# Altium PCB Main.PcbDoc
Units mm, origin at the board's own origin, x right, y up, seen from the top; angles counter-clockwise.
Board outline 300 x 200 mm, 2 copper layers (Top Layer, Bottom Layer), stack 1.671 mm thick; 38 components, 61 nets, 422 pads, 37 vias.
Unrouted connection lines stored in the file: 3.
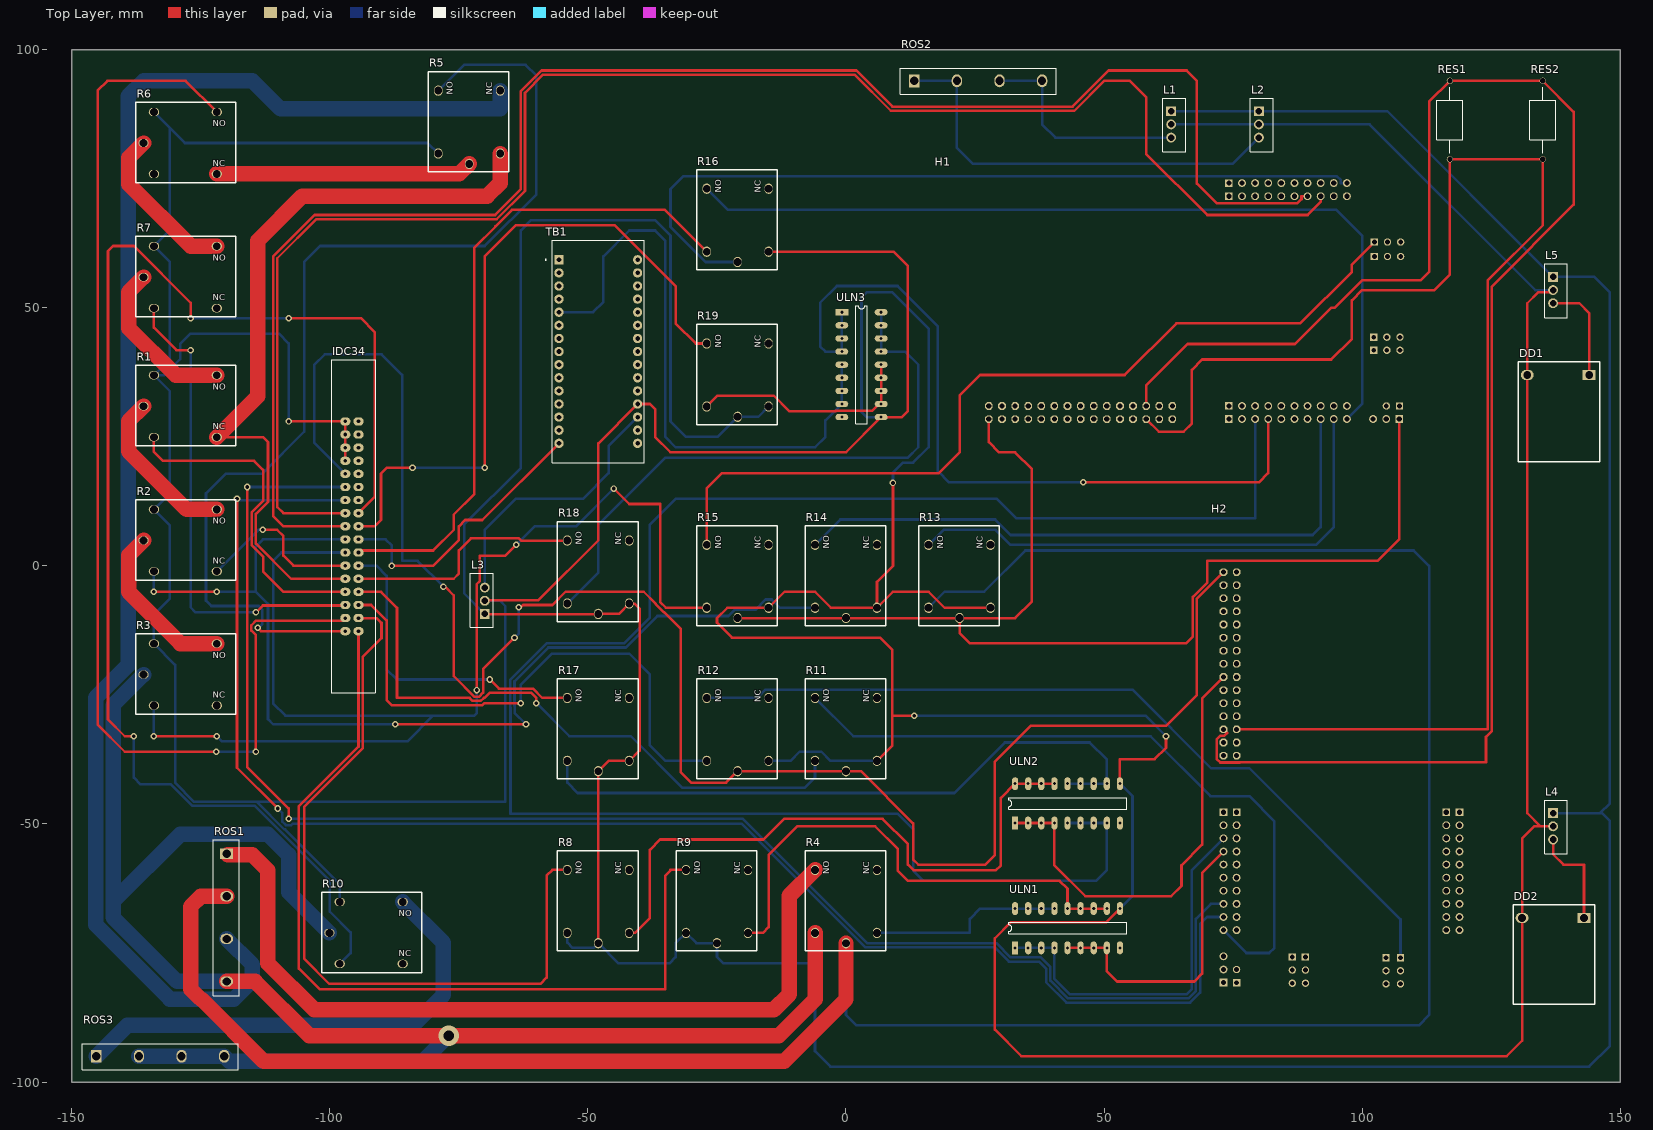
[diagram p0: Top Layer view]
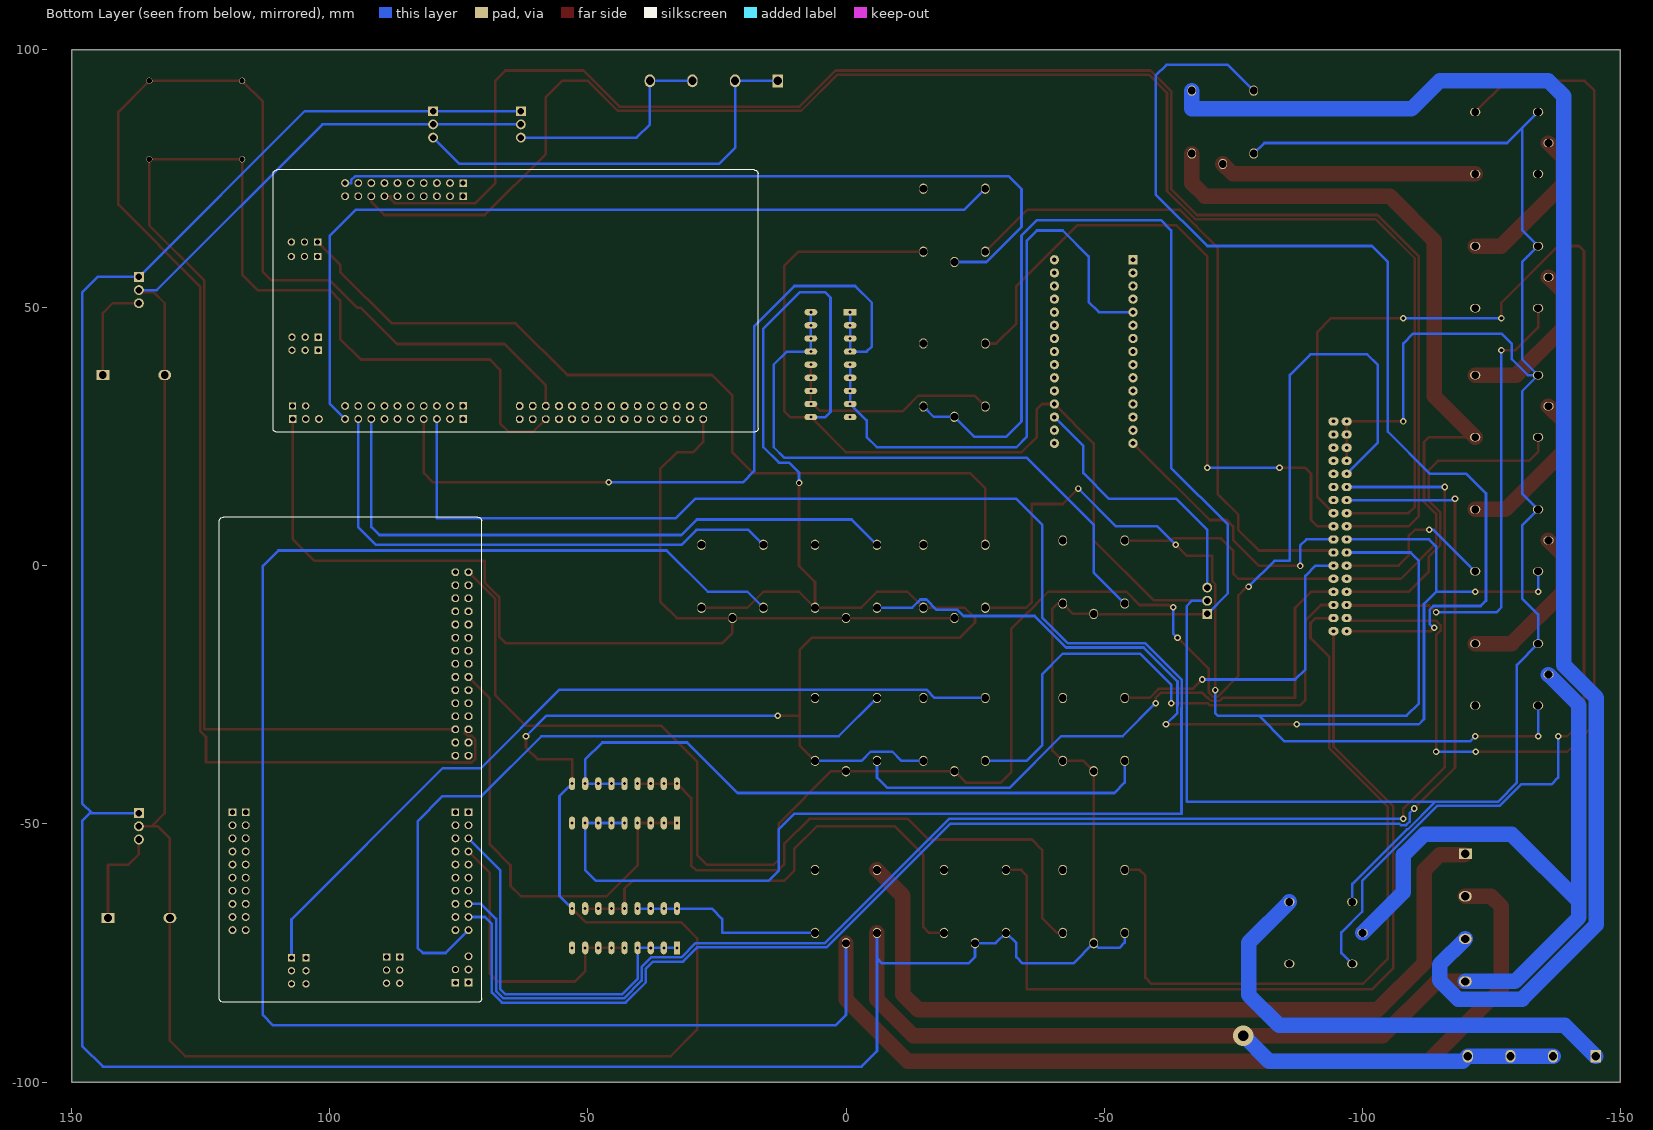
[diagram p1: Bottom Layer view, seen from below]
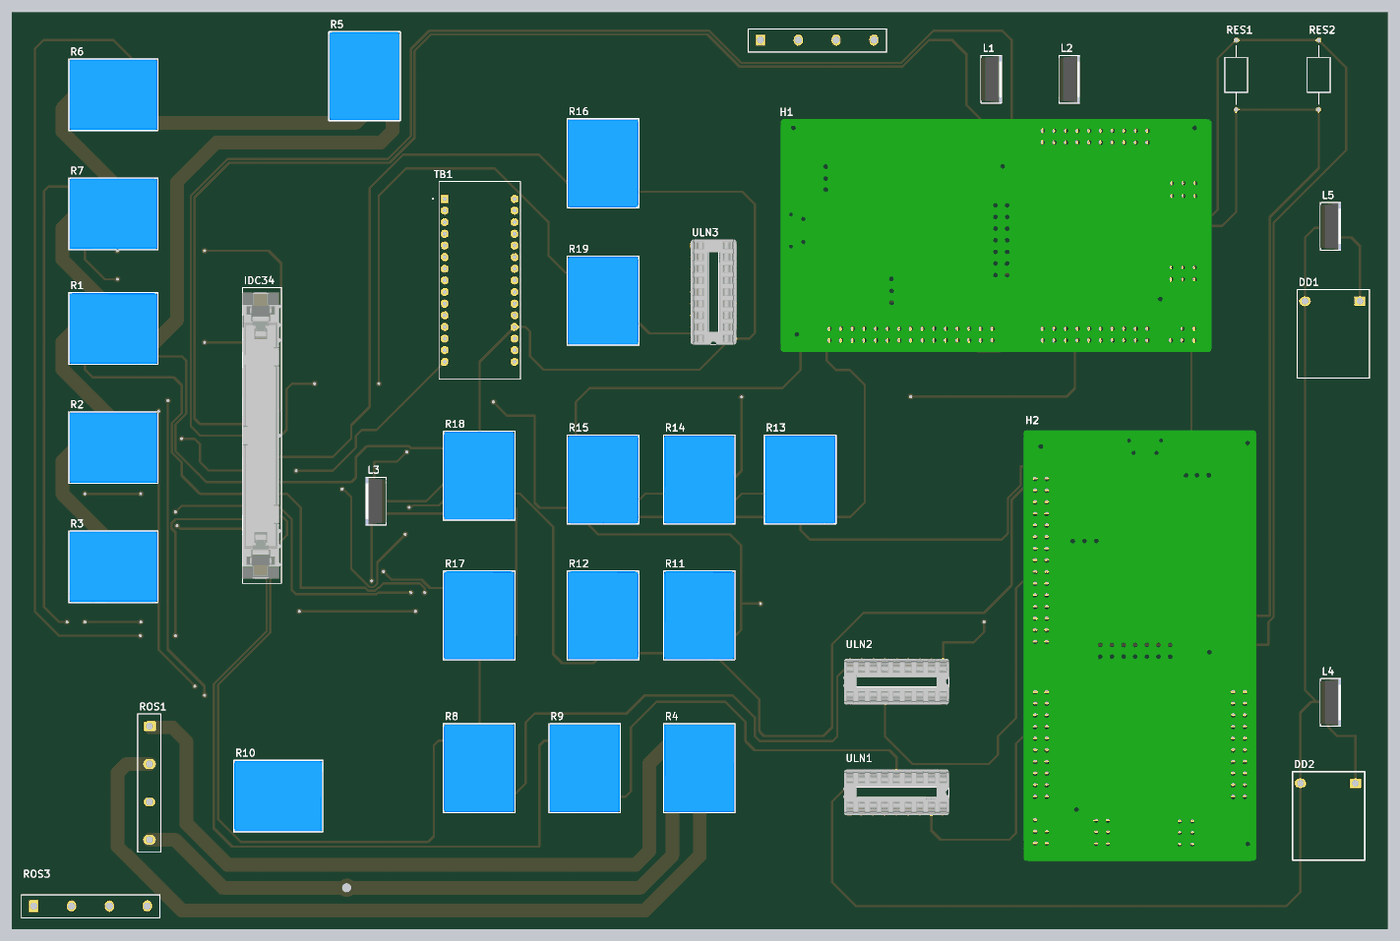
[diagram p2: 3D render of the assembled board from above, using the file's embedded part models]

## Layer stack, top to bottom
Top Solder: solder mask 0.0102, Solder Resist, Dk 3.5
Top Layer: signal copper 0.0356
Dielectric 1: dielectric 1.6, FR-4, Dk 4.8
Bottom Layer: signal copper 0.0356
Bottom Solder: solder mask 0.0102, Solder Resist, Dk 3.5

## Board outline
150,-100 150,100 -150,100 -150,-100

## Design rules (kind name [scope] priority, off if disabled: settings)
Clearance [All] p1: gap=0.5 ignorepadtopadclearanceinfootprint=FALSE
Height [All] p1: minheight=0 maxheight=100 prefheight=12.7
PolygonConnect [All] p1: connectstyle=Relief reliefconductorwidth=0.254 reliefentries=4 polygonreliefangle="90 Angle" airgapwidth=0.254
RoutingVias [All] p1: holewidth=0.3 width=0.6 viastyle="Through Hole" minholewidth=0.3 minwidth=0.6 maxholewidth=0.3 maxwidth=0.6
SolderMaskExpansion [All] p1: expansion=0.102
Width [All] p1: maxlimit=3 minlimit=0.5 preferedwidth=0.5
29 further rules are at their usual default settings.

## Components (designator, comment, footprint, x,y, rotation, side; value= is the part's Value field where it differs from the comment)
DD1 "DD" DCDCBOOST 144,37 r180 top
DD2 "DD" DCDCBOOST 143,-68.2 r180 top
H1 "RM42" HERCULES 60.49,51.322 r180 top
H2 "RM42" HERCULES 96,-34 r90 top
IDC34 "IDC Header" IDC34 -95.73,7.68 r0 top
L1 "L7805C-V" L7805C-P 63,88.1 r270 top
L2 "L7805C-V" L7805C-P 80,88.1 r270 top
L3 "L7805C-V" L7805C-P -70,-9.29 r90 top
L4 "L7805C-V" L7805C-P 137,-47.9 r270 top
L5 "L7805C-V" L7805C-P 137,56 r270 top
R1 "Relay" RELAYARP03F -128,30.95 r0 top
R2 "Relay" RELAYARP03F -128,4.95 r0 top
R3 "Relay" RELAYARP03F -128,-21.05 r0 top
R4 "Relay" RELAYARP03F 0,-65 r90 top
R5 "Relay" RELAYARP03F -73,86 r90 top
R6 "Relay" RELAYARP03F -128,81.95 r0 top
R7 "Relay" RELAYARP03F -128,55.95 r0 top
R8 "Relay" RELAYARP03F -48,-65 r90 top
R9 "Relay" RELAYARP03F -25,-65 r90 top
R10 "Relay" RELAYARP03F -92,-71.1 r0 top
R11 "Relay" RELAYARP03F 0,-31.67 r90 top
R12 "Relay" RELAYARP03F -21,-31.67 r90 top
R13 "Relay" RELAYARP03F 22,-2 r90 top
R14 "Relay" RELAYARP03F 0,-2 r90 top
R15 "Relay" RELAYARP03F -21,-2 r90 top
R16 "Relay" RELAYARP03F -21,67 r90 top
R17 "Relay" RELAYARP03F -48,-31.67 r90 top
R18 "Relay" RELAYARP03F -48,-1.19 r90 top
R19 "Relay" RELAYARP03F -21,37 r90 top
RES1 "RES120" RES120 117,78.8 r90 top
RES2 "RES120" RES120 135,78.8 r90 top
ROS1 "SDCROSSETA" ROSSETA -120,-55.75 r0 top
ROS2 "SDCROSSETA" ROSSETA 13.24,94 r90 top
ROS3 "SDCROSSETA" ROSSETA -145.25,-95 r90 top
TB1 "ARDUINO_NANO" SHIELD_ARDUINO_NANO -48,41.54 r0 top
ULN1 "ULN2803APG" ULN2803APG 42.92,-70.19 r90 top
ULN2 "ULN2803APG" ULN2803APG 42.92,-46 r90 top
ULN3 "ULN2803APG" ULN2803APG 3,39 r0 top

## Footprints (in the part's own frame and the unit in brackets; to place one, negate y for a bottom-side part, rotate by r counter-clockwise, add the part's x,y. Pads: shape width x height; smd on the part's side, far side on the other; paste and mask are expansions set on the pad)
DCDCBOOST [mm]
  rect 2.5x2 hole 1.5: 1(0,0)
  oval 2.5x2 hole 1.5: 2(12,0)
  silkscreen extent -2.03,-2.54 13.72,16.76
HERCULES [mil]
  rect 56x56 / inner rect 60x60 / far side rect 56x56 hole 36: 1(-1840.42,799.92) 71(-1649.42,-450.08) 74(-1649.42,-340.08) 76(-1644.42,274.92) 78(-1644.42,374.92)
  rect 58.09x58.09 / inner rect 60x60 / far side rect 58.09x58.09 hole 40: 1(-1839.42,899.92) 31(-539.42,899.92) 32(-539.42,799.92) 51(-539.42,-800.08) 52(-539.42,-900.08)
  oct 58.09x58.09 / inner oct 60x60 / far side oct 58.09x58.09 hole 40: 1(1291.74,900.09) 2(1291.74,800.09) 3(1191.74,900.09) 4(1191.74,800.09) 5(1091.74,900.09) 6(1091.74,800.09) 7(991.74,900.09) 8(991.74,800.09) 9(891.74,900.09) 10(891.74,800.09) 11(791.74,900.09) 12(791.74,800.09) 13(691.74,900.09) 14(691.74,800.09) 15(591.74,900.09) 16(591.74,800.09) 17(491.74,900.09) 18(491.74,800.09) 19(391.74,900.09) 20(391.74,800.09) 21(291.74,900.09) 22(291.74,800.09) 23(191.74,900.09) 24(191.74,800.09) 25(91.74,900.09) 26(91.74,800.09) 27(-8.26,900.09) 28(-8.26,800.09) 29(-108.26,900.09) 30(-108.26,800.09)
  round 56 / inner round 60 / far side round 56 hole 36: 2(-1740.42,799.92) 72(-1849.42,-450.08) 73(-1849.42,-340.08) 75(-1844.42,274.92) 77(-1844.42,374.92) 79(-1744.42,374.92) 80(-1744.42,274.92) 81(-1749.42,-340.08) 82(-1749.42,-450.08)
  round 60 hole 40: 2(-1739.42,899.92) 3(-1639.42,899.92) 33(-639.42,899.92) 34(-639.42,799.92) 35(-739.42,899.92) 36(-739.42,799.92) 37(-839.42,899.92) 38(-839.42,799.92) 39(-939.42,899.92) 40(-939.42,799.92) 41(-1039.42,899.92) 42(-1039.42,799.92) 43(-1139.42,899.92) 44(-1139.42,799.92) 45(-1239.42,899.92) 46(-1239.42,799.92) 47(-1339.42,899.92) 48(-1339.42,799.92) 49(-1439.42,899.92) 50(-1439.42,799.92) 53(-639.42,-800.08) 54(-639.42,-900.08) 55(-739.42,-800.08) 56(-739.42,-900.08) 57(-839.42,-800.08) 58(-839.42,-900.08) 59(-939.42,-800.08) 60(-939.42,-900.08) 61(-1039.42,-800.08) 62(-1039.42,-900.08) 63(-1139.42,-800.08) 64(-1139.42,-900.08) 65(-1239.42,-800.08) 66(-1239.42,-900.08) 67(-1339.42,-800.08) 68(-1339.42,-900.08) 69(-1439.42,-800.08) 70(-1439.42,-900.08)
  Top Layer lines w6: 1091.74,800.09 1090.58,801.25 1090.58,804.92 ; 991.74,900.09 990.74,895.08 ; 791.74,900.09 785.75,900.09 ; 691.74,900.09 690.74,880.08 ; 591.74,900.09 591.74,896.08 ; 491.74,900.09 485.75,900.09 ; 291.74,900.09 290.74,895.08 ; 191.74,900.09 190.74,890.08 ; -8.26,900.09 -8.26,886.08 ; -639.42,799.92 -639.42,769.92 ; -1134.42,804.92 -1139.42,799.92 ; -1739.42,804.92 -1739.42,799.92 -1740.42,799.92
  Top Layer lines w19.68: -1649.42,-450.08 -1654.42,-450.08
  Bottom Layer lines w6: -739.42,804.92 -736.92,802.42 -739.42,799.92 ; -1844.42,374.92 -1844.42,359.92 ; -1844.42,274.92 -1844.42,244.92
  Bottom Layer lines w19.68: -1439.42,904.92 -1439.42,899.92
  body extent -2013,-1000 1687,1000, height 64
IDC34 [mm]
  oval 2x1.6 hole 0.7: 1(-1.27,20.32) 2(-1.27,17.78) 3(-1.27,15.24) 4(-1.27,12.7) 5(-1.27,10.16) 6(-1.27,7.62) 7(-1.27,5.08) 8(-1.27,2.54) 9(-1.27,0) 10(-1.27,-2.54) 11(-1.27,-5.08) 12(-1.27,-7.62) 13(-1.27,-10.16) 14(-1.27,-12.7) 15(-1.27,-15.24) 16(-1.27,-17.78) 17(-1.27,-20.32) 18(1.27,-20.32) 19(1.27,-17.78) 20(1.27,-15.24) 21(1.27,-12.7) 22(1.27,-10.16) 23(1.27,-7.62) 24(1.27,-5.08) 25(1.27,-2.54) 26(1.27,0) 27(1.27,2.54) 28(1.27,5.08) 29(1.27,7.62) 30(1.27,10.16) 31(1.27,12.7) 32(1.27,15.24) 33(1.27,17.78) 34(1.27,20.32)
  silkscreen extent -4,-32.25 4.5,32.25, body extent -4.02,-31.25 4.52,31.23, height 26.81
L7805C-P [mm]
  rect 1.91x1.91 hole 1.27: 1(0,0)
  round 1.91 hole 1.27: 2(2.55,0) 3(5.1,0)
  silkscreen extent -2.54,-1.65 7.87,2.79, body extent -2.43,-1.65 7.77,2.85, height 19.21
RELAYARP03F [mm]
  oval 2x1.6 hole 1.5: 1(6.1,6) 2(6.1,-6) 3(-6.1,6) 4(-6.1,-6) 5(-8.1,0)
  silkscreen extent -9.6,-7.7 9.8,7.9, body extent -9.5,-7.6 9.7,7.8, height 15.71
RES120 [mm]
  round 1.2 hole 1: 1(0,0) 2(15.2,0)
  silkscreen extent 1.2,-2.5 14,2.5
ROSSETA [mm]
  rect 2.5x2 hole 1.6: 1(0,0)
  oval 2.5x2 hole 1.6: 2(0,-8.25) 3(0,-16.51) 4(0,-24.76)
  silkscreen extent -2.62,-27.51 2.44,2.69
SHIELD_ARDUINO_NANO [mm]
  rect 1.8x1.8 hole 0.9: 1(-7.62,17.78)
  round 1.8 hole 0.9: 2(-7.62,15.24) 3(-7.62,12.7) 4(-7.62,10.16) 5(-7.62,7.62) 6(-7.62,5.08) 7(-7.62,2.54) 8(-7.62,0) 9(-7.62,-2.54) 10(-7.62,-5.08) 11(-7.62,-7.62) 12(-7.62,-10.16) 13(-7.62,-12.7) 14(-7.62,-15.24) 15(-7.62,-17.78) 16(7.62,-17.78) 17(7.62,-15.24) 18(7.62,-12.7) 19(7.62,-10.16) 20(7.62,-7.62) 21(7.62,-5.08) 22(7.62,-2.54) 23(7.62,0) 24(7.62,2.54) 25(7.62,5.08) 26(7.62,7.62) 27(7.62,10.16) 28(7.62,12.7) 29(7.62,15.24) 30(7.62,17.78)
  silkscreen extent -10.3,-21.59 8.89,21.59
ULN2803APG [mm]
  rect 2.5x1.2 hole 0.6: 1(-3.81,10.16)
  oval 2.5x1.2 hole 0.6: 2(-3.81,7.62) 3(-3.81,5.08) 4(-3.81,2.54) 5(-3.81,0) 6(-3.81,-2.54) 7(-3.81,-5.08) 8(-3.81,-7.62) 9(-3.81,-10.16) 10(3.81,-10.16) 11(3.81,-7.62) 12(3.81,-5.08) 13(3.81,-2.54) 14(3.81,0) 15(3.81,2.54) 16(3.81,5.08) 17(3.81,7.62) 18(3.81,10.16)
  silkscreen extent -1.12,-11.43 1.12,11.43, body extent -5,-11.43 5,11.43, height 5.11

## Part data
DD1 DD2: library part DCDCBoost
H1 H2: library part Hercules
IDC34: library part IDC34
L1 L2 L3 L4 L5: "STMICROELECTRONICS 	   	L7805CV 	   	Linear Voltage Regulators & Vref", Case/Package=TO, Dropout Voltage=2V, Manufacturer=STMicroelectronics, Max Input Voltage=35V, Max Operating Temperature=125°C, Max Output Current=1.5A, Min Input Voltage=7V, Min Operating Temperature=0°C, Min Output Voltage=5V, Package Quantity=1000, Power Supply Rejection Ratio (PSRR)=62dB, Quiescent Current=8mA, Supplier Part Number 1=L7805CV, Tolerance=5%, ComponentLink1Description=http://www.st.com/content/ccc/resource/technical/document/datasheet/41/4f/b3/b0/12/d4/47/88/CD00000444.pdf/files/CD00000444.pdf/jcr:content/translations/en.CD00000444.pdf?src-supplier=Digi-Key, ComponentLink1URL=http://www.st.com/content/ccc/resource/technical/document/datasheet/41/4f/b3/b0/12/d4/47/88/CD00000444.pdf/files/CD00000444.pdf/jcr:content/translations/en.CD00000444.pdf?src-supplier=Digi-Key, ComponentLink2Description=https://www.verical.com/server-webapp/html/getDatasheet?partID=44136&src-supplier=Verical, ComponentLink2URL=https://www.verical.com/server-webapp/html/getDatasheet?partID=44136&src-supplier=Verical, ComponentLink3Description=http://www.jameco.com/Jameco/Products/ProdDS/924633.pdf?src-supplier=Jameco, ComponentLink3URL=http://www.jameco.com/Jameco/Products/ProdDS/924633.pdf?src-supplier=Jameco, ComponentLink4Description=http://www.farnell.com/datasheets/2051023.pdf?src-supplier=Element14, ComponentLink4URL=http://www.farnell.com/datasheets/2051023.pdf?src-supplier=Element14, ComponentLink5Description=https://www.distrelec.biz/Web/Downloads/xc/_e/teL78xx-L78xxC_e.pdf?mime=application%2Fpdf&src-supplier=Distrelec, ComponentLink5URL=https://www.distrelec.biz/Web/Downloads/xc/_e/teL78xx-L78xxC_e.pdf?mime=application%2Fpdf&src-supplier=Distrelec, ComponentLink6Description=http://www.farnell.com/datasheets/2307057.pdf?src-supplier=Element14, ComponentLink6URL=http://www.farnell.com/datasheets/2307057.pdf?src-supplier=Element14, ComponentLink7Description=http://www.rapidonline.com/pdf/47-3290e.pdf?src-supplier=Rapid+Electronics, ComponentLink7URL=http://www.rapidonline.com/pdf/47-3290e.pdf?src-supplier=Rapid+Electronics, ComponentLink8Description=http://www.farnell.com/datasheets/1805459.pdf?src-supplier=Element14, ComponentLink8URL=http://www.farnell.com/datasheets/1805459.pdf?src-supplier=Element14, ComponentLink9Description=http://www.st.com/web/en/resource/technical/document/datasheet/CD00000444.pdf?src-supplier=Digi-Key, ComponentLink9URL=http://www.st.com/web/en/resource/technical/document/datasheet/CD00000444.pdf?src-supplier=Digi-Key, ComponentLink10Description=http://www.farnell.com/datasheets/1805459.pdf?src-supplier=Newark, ComponentLink10URL=http://www.farnell.com/datasheets/1805459.pdf?src-supplier=Newark, ComponentLink11Description=http://www.st.com/web/en/resource/technical/document/datasheet/CD00000444.pdf?src-supplier=Future+Electronics, ComponentLink11URL=http://www.st.com/web/en/resource/technical/document/datasheet/CD00000444.pdf?src-supplier=Future+Electronics, ComponentLink12Description=http://www.produktinfo.conrad.com/datenblaetter/150000-174999/156048-da-01-en-SPANNUNGSREGLER_L_7805_CV__TO220__STM.pdf?src-supplier=Conrad, ComponentLink12URL=http://www.produktinfo.conrad.com/datenblaetter/150000-174999/156048-da-01-en-SPANNUNGSREGLER_L_7805_CV__TO220__STM.pdf?src-supplier=Conrad, ComponentLink13Description=http://datasheet.iiic.cc/stmicroelectronics/L7805CV.pdf?src-supplier=IIIC, ComponentLink13URL=http://datasheet.iiic.cc/stmicroelectronics/L7805CV.pdf?src-supplier=IIIC, Contact Plating=Gold, Height=9.15mm, Lead Free="Lead Free", Length=10.4mm, Manufacturer Part Number=L7805C-V, Mount="Through Hole", Nominal Output Voltage=5V, Number of Outputs=1, Number of Pins=3, Number of Regulators=1, Output Configuration=Positive, Output Current=1.5A, Output Type=Fixed, Output Voltage=5V, Packaging=Rail/Tube, Polarity=Positive, Radiation Hardening=No, REACH SVHC="No SVHC", Stock 1=0, Supplier 1=Quest, Weight=0.08113oz, Width=4.6mm
R1 R2 R3 R4 R5 R6 R7 R8 R9 R10 R11 R12 R13 R14 R15 R16 R17 R18 R19: library part RelayARP03F, "Max 12A switching capability / 1 form A and 1 form C contact arrangement / Coil voltage: 3~48VDC / Contact capacity: 10A  28VDC / 240VAC / Outline size: 19×15.5×15.5 (mm)", Coil Voltage=3-48v, Max Switching Current=12A, Category=Relays
RES1 RES2: "Carbon Resistor 120.0 ohm 1/4W"
TB1: "Dev.kit: Arduino; UART; ICSP, USB B mini, pin strips", Package=None, Availability=Unavailable, MF=Arduino, MP="ARDUINO NANO", Price=None, SnapEDA_Link=https://www.snapeda.com/parts/ARDUINO%20NANO/Arduino/view-part/?ref=snap

## Via types
v1: diameter 1.27, hole 0.711, Top Layer to Bottom Layer, tented both sides, 36 vias
v2: diameter 4, hole 2, Top Layer to Bottom Layer, tented both sides, 1 vias

## Nets (pads, with @x,y where several pads share a name; then routed paths per layer and width w, separated by ;. In a path a pad name is that pad's centre, name@x,y a point inside that pad or via, vN(x,y) a via of type N, cw(c..) or ccw(c..) an arc to the next point about the centre after c; other vN are vias at no path point)
3V3: H2.1 IDC34.5 R11.5 R12.5 | length 361.1
  Top Layer w0.5: v1@-77.5,-4.19 -76,-5.69 -76,-21.351 -71.996,-25.355 -71.114,-25.355 -70.32,-24.561 -70.32,-19.975 v1(-64.235,-13.89) ; v1@-63,-8 -62.56,-7.56 -56.87,-7.56 -54.31,-5 -39.19,-5 -36.9,-7.29 -36.9,-7.373 -35.273,-9 -35.19,-9 -32,-12.19 -32,-40 -30,-42 -23.23,-42 R12.5 R11.5@-0.33,-39.77 ; R11.5@0,-40.1 R11.5@-0.33,-39.77 ; H2.1@73.138,-1.19 68,-6.328 68,-25 62,-31 35.77,-31 28.861,-37.909 28.861,-56 27,-57.861 14,-57.861 13,-56.861 13,-49.861 2.909,-39.77 R11.5 R11.5@-0.33,-39.77
  Bottom Layer w0.5: IDC34.5 -103,23.84 -103,39 -101,41 -90,41 -86,37 -86,1 -83,1 v1(-78,-4) ; v1(-64.235,-13.89) -63.388,-13.043 v1(-63.388,-8)
12v: L1.1 L2.1 L3.1 L4.1 L5.1 R3.5 R4.3 R8.3 R8.5 R9.3 R9.5 R10.5 R17.4 R17.5 R18.4 R18.5 R19.4 R19.5 ROS1.4 ROS3.2 ROS3.3 ROS3.4 | length 1101.6
  Top Layer w0.5: L3.1 -69.955,-9.335 -48.045,-9.335 R18.5 -44,-9.29 R18.4 -41,-7.29 -40,-8.29 -40,-35.77 R17.4 -46,-37.77 R17.5 R8.5
  Top Layer w3: ROS1.4 -114.49,-80.51 -104,-91 v2(-77,-91) -13,-91 -6,-84 R4.3
  Bottom Layer w0.5: L3.1 -74,-5.29 -74,8 -63,19 -63,65 -61,67 -37,67 -34,64 -34,28 -31,25 -24.9,25 R19.5 -17,28.9 R19.4 ; R8.3 -54,-73 -53,-74 -48.9,-74 R8.5 -44.1,-77 -34.232,-77 -33,-75.768 -33,-73.1 R9.3 -29,-73.1 R9.5 -25,-75.768 -23.768,-77 -7,-77 -6,-76 ; R4.3 -6,-76 ; L1.1 L2.1 104.9,88.1 L5.1 145,56 148,53 148,-46 146.1,-47.9 ; L4.1 146.1,-47.9 ; -6,-76 -6,-94 -3,-97 144,-97 148,-93 148,-49.45 146.45,-47.9 146.1,-47.9
  Bottom Layer w3: ROS3.2 ROS3.3 ROS3.4 -119.49,-96 -82,-96 v2(-77,-91) ; R3.5 -142,-26.95 -142,-65 ; ROS1.4 -129.59,-80.51 -142,-68.1 -142,-65 ; R10.5 -108,-63.2 -108,-56 -112,-52 -129,-52 -142,-65
AIR+VE: R4.1 ROS1.1 | length 159.5
  Top Layer w0.5: ROS1.1 ROS1.1@-119.75,-56
  Top Layer w3: ROS1.1@-119.75,-56 -115,-56 -112,-59 -112,-77 -103,-86 -14,-86 -11,-83 -11,-63.9 R4.1
AIR-VE: R4.5 R13.3 ROS1.2 | length 490.3
  Top Layer w3: -125.4,-83.6 -127,-82 -127,-66 -125,-64 ROS1.2 ; -124.912,-83.912 -112.824,-96 -12,-96 0,-84 R4.5
  Bottom Layer w0.5: R4.5 0,-87 2,-89 111,-89 113,-87 113,0 110,3 34.76,3 26.76,-5 19.1,-5 R13.3
"AMS Discharge": IDC34.14 R1.4 | length 64.5
  Top Layer w0.5: R1.4 -134.1,22.1 -132.38,20.38 -114.71,20.38 -112.95,18.62 -112.95,12.601 -115.13,10.421 -115.13,3.999 -112.95,1.819 -112.95,-1.07 -109,-5.02 IDC34.14
"AMS LED": IDC34.13 R1.2 R5.4 | length 149.8
  Top Layer w0.5: R1.2 -112.95,24.95 -112,24 -112,12.42 -114.33,10.09 -114.33,4.33 -107.52,-2.48 IDC34.13
  Top Layer w3: R1.2 -114,32.85 -114,63 -105.356,71.644 -69.54,71.644 -67,74.184 R5.4
"AMS RST": IDC34.17 R5.1 | length 205.7
  Top Layer w0.5: v1(-114,-12) -113.36,-12.64 IDC34.17
  Bottom Layer w0.5: v1@-113.819,-12 -113.095,-11.277 -113.095,-8.488 -113.819,-7.765 -122.975,-7.765 -124,-6.74 -124,14.05 -120.21,17.84 -113.16,17.84 -105,26 -105,58.9 -101.9,62 -70,62 -60,72 -60,95 -62.1,97.1 -74,97.1 R5.1
APPS1: H1.65 IDC34.8 | length 314.6
  Top Layer w0.5: IDC34.8 -109,10.22 -110.2,11.42 -110.2,59.619 -102.619,67.2 -67.669,67.2 -62.2,72.669 -62.2,91.669 -58.669,95.2 1.669,95.2 8.669,88.2 44.231,88.2 50.031,94 55,94 58.16,90.84 58.16,79.84 70,68 89.431,68 91.971,70.54 H1.65
APPS2: H1.63 IDC34.9 | length 320.6
  Top Layer w0.5: IDC34.9 -109,7.68 -111,9.68 -111,59.95 -102.95,68 -68,68 -63,73 -63,92 -59,96 2,96 9,89 43.9,89 50.9,96 66,96 68,94 68,74.1 71.818,70.282 87.456,70.282 88.253,71.08 88.253,71.644 H1.63
"Brake Light": IDC34.26 R19.1 | length 134.6
  Top Layer w0.5: IDC34.26 -91.32,7.68 -90.1,8.9 -90.1,17.9 -89,19 v1(-84,19) ; v1(-70,19) -70,60 -64,66 -44.8,66 -33,54.2 -33,47 -29.1,43.1 R19.1
  Bottom Layer w0.5: v1(-84,19) v1(-70,19)
"Brake Pedal": IDC34.25 TB1.15 | length 54.7
  Top Layer w0.5: v1(-88,0) -80,0 -75,5 -75,7.68 -73.78,8.9 -70.48,8.9 TB1.15
  Bottom Layer w0.5: IDC34.25 -89.19,5.14 -88,3.95 v1(-88,0)
BSPD: IDC34.11 R3.4 R15.3 | length 247
  Top Layer w0.5: v1(-134.1,-33) v1(-121.9,-33) ; v1@-71.555,-24.555 v1(-71.555,-24.05) -71.555,-3.546 -71,-2.991 -71,2 -66,2 v1(-63.9,4.1) ; v1(-45,15) -42,12 -36,12 -36,-7 -34.9,-8.1 R15.3
  Bottom Layer w0.5: v1(-134.1,-33) R3.4 ; v1(-121.9,-33) -120.9,-34 -85,-34 -80,-29 ; -108.666,-28.95 -108.616,-29 ; IDC34.11 -109.4,2.6 -111,1 -111,-26.616 -108.616,-29 ; v1(-71.555,-24.05) -71.555,-28.555 -72,-29 -80,-29 ; v1@-64,4 v1(-63.9,4.1) -60.32,7.68 -52.32,7.68 v1(-45,15) ; -108.616,-29 -80,-29
DC60: IDC34.20 R12.3 | length 107.4
  Top Layer w0.5: IDC34.20 -92,-7.56 -89,-10.56 -89,-26 -88.045,-26.955 -70.451,-26.955 -70.086,-26.59 v1(-63,-26.59)
  Bottom Layer w0.5: v1(-63,-26.59) -63,-23 -57,-17 -42,-17 -38,-21 -38,-34.75 -34.98,-37.77 R12.3
DC90: IDC34.21 R11.3 | length 120.4
  Top Layer w0.5: IDC34.21 -90.1,-5.02 -87,-8.12 -87,-25.555 -72.928,-25.555 -72.328,-26.155 -70.782,-26.155 -70.182,-25.555 -70,-25.555 -69,-24.555 -61,-24.555 -60,-25.555 v1(-60,-26.59)
  Bottom Layer w0.5: v1(-60,-26.59) -53.59,-33 -41.67,-33 -31.67,-43 -8,-43 -6,-41 R11.3
ENABLE: IDC34.22 R18.1 | length 46.5
  Top Layer w0.5: IDC34.22 -76,-2.48 -75,-1.48 -75,3 -72.665,5.335 -63.388,5.335 -62.964,4.91 R18.1
"Fan Enable": IDC34.27 R10.4 | length 267.2
  Top Layer w0.5: v1(-138,-33) -139.75,-33 -143,-29.75 -143,61 -142,62 -138,62 -127,51 v1(-127,48) ; v1(-108,48) -94,48 -91.32,45.32 -91.32,13.36 IDC34.27
  Bottom Layer w0.5: v1(-138,-33) -138,-41 -136.669,-42.331 -130.8,-42.331 -126.63,-46.501 -114.529,-46.501 -100,-61.03 -100,-67 -96,-71 -96,-75 R10.4 ; v1(-127,48) v1(-108,48)
GND: DD1.2 DD2.2 IDC34.1 IDC34.2 IDC34.3 IDC34.4 L1.2 L2.2 L3.2 L4.2 L5.2 R1.3 R2.3 R3.3 R5.3 R6.3 R7.3 R10.3 R11.4 R12.4 R13.4 R14.4 R15.4 R16.4 TB1.19 ULN1.10 ULN2.10 ULN3.10 | length 1304
  Top Layer w0.5: v1(-108,28) IDC34.1 IDC34.2 IDC34.3 IDC34.4 ; L3.2 -69.92,-6.66 -59.64,-6.66 -48,4.98 -48,23.76 TB1.19 -38,31.38 -37,30.38 -37,25 -34.03,22.03 0,22.03 ULN3.10 10.84,28.84 12,30 12,58.1 9.2,60.9 R16.4 ; R11.4 9,-34.77 9,-29 ; v1(9.1,16.089) 9.1,0 6,-3.1 R14.4 ; v1(13.24,-29) 9,-29 ; R13.4 19.1,-8.1 16,-5 9.1,-5 R14.4 ; ULN1.10 50.461,-69 32,-69 28.861,-72.139 28.861,-89.861 34,-95 128,-95 131,-92 DD2.2 131,-52.781 133.331,-50.45 134.55,-50.45 ; ULN2.10 53.08,-37.447 59.793,-37.447 62,-35.24 v1(62,-33) ; L4.2 134.55,-50.45 ; L5.2 136.55,53 134.1,53 132,50.9 DD1.2 132,-47.9 134.55,-50.45 ; R14.4 -2.9,-8.1 -6,-5 -11.9,-5 R15.4 -23,-8.1 -25,-10.1 -25,-11 -22.11,-13.89 6.56,-13.89 9,-16.33 9,-29
  Bottom Layer w0.5: R6.3 -131,84.85 ; v1(-108,28) -108,43.1 -109.9,45 -127,45 -129,43 -129,40.05 -132.1,36.95 R1.3 ; R10.3 -98.1,-61.601 -108.666,-51.035 -108.843,-51.035 -114,-45.878 -114,-45.701 ; R5.3 -81.05,81.95 -128.1,81.95 -131,84.85 ; L3.2 -67.07,-6.74 -66,-7.81 -66,-45.701 -114,-45.701 ; R12.4 -10.77,-37.77 -9,-36 -4.77,-36 -3,-37.77 R11.4 ; ULN3.10 4,28.84 3,29.84 3,52 4,53 9,53 16,46 16,23 13,20 11,20 9.1,18.1 v1(9.1,16.089) ; v1@13,-29 v1(13.24,-29) 58,-29 v1(62,-33) ; ULN1.10 55.507,-63.954 55.507,-44.617 ULN2.10 ; L1.2 L2.2 101.45,85.55 133.55,53.45 L5.2 ; R1.3 -131,40.05 -131,58.85 R7.3 -131,65.05 -131,84.85 ; R1.3 -131,33.85 -131,14.05 R2.3 -131,7.85 -131,-6.29 -134.1,-9.39 R3.3 -130,-19.15 -130,-42 -126.299,-45.701 -114,-45.701
HVD: IDC34.15 R7.4 | length 93.8
  Top Layer w0.5: R7.4 -134.1,46.18 -129.719,41.799 v1(-127,41.799) ; v1(-114.33,-9) -113,-7.67 -97.11,-7.67 IDC34.15
  Bottom Layer w0.5: v1(-127,41.799) -127,-8 -126,-9 v1(-114.33,-9) v1@-114,-9
IMD: IDC34.10 R2.4 R14.3 | length 201.2
  Top Layer w0.5: v1(-134.1,-5.02) v1(-121.92,-5.02) ; v1(-87.33,-30.67) v1(-62,-30.67)
  Bottom Layer w0.5: v1(-134.1,-5.02) R2.4 ; v1(-121.92,-5.02) -114.33,-5.02 ; IDC34.10 -113,5.14 -114.33,3.81 -114.33,-5.02 ; v1(-87.33,-30.67) -111,-30.67 -112,-29.67 -112,-7.35 -114.33,-5.02 ; v1(-62,-30.67) -64.2,-28.47 -64.2,-27.136 -64.235,-27.101 -64.235,-22.366 -57.669,-15.8 -42.669,-15.8 -36.569,-9.7 -22.78,-9.7 -21.58,-8.5 -17.58,-8.5 -15.58,-6.5 -14.42,-6.5 -12.82,-8.1 R14.3
"IMD LED": IDC34.12 R2.2 | length 33.3
  Top Layer w0.5: v1(-113,7) -110.2,7 -109,5.8 -109,2 -107.06,0.06 IDC34.12
  Bottom Layer w0.5: R2.2 -113.85,7 v1(-113,7)
"IMD RST": IDC34.16 R6.1 | length 225.8
  Top Layer w0.5: v1(-122,-36) -139.75,-36 -145,-30.75 -145,92.1 -143.1,94 -127.95,94 R6.1 ; v1(-114.33,-36) -114.33,-13.416 -115.235,-12.512 -115.235,-11.488 -114.33,-10.584 -97.484,-10.584 IDC34.16
  Bottom Layer w0.5: v1(-122,-36) v1(-114.33,-36)
INV-ERR: IDC34.24 R16.3 | length 128
  Top Layer w0.5: IDC34.24 -94.06,3 -80,3 -76,7 -76,9.95 -72,13.95 -72,61.669 -67.944,65.725 -67.944,65.794 -64.737,69 -35.1,69 R16.3
NetDD1_1: DD1.1 L5.3 | length 19.8
  Top Layer w0.5: L5.3 142.1,50.9 144,49 DD1.1
NetDD2_1: DD2.1 L4.3 | length 20
  Top Layer w0.5: L4.3 137,-55.861 139,-57.861 143,-57.861 DD2.1
NetH1_1: H1.1 R13.5 R14.5 R15.5 | length 226.4
  Top Layer w0.5: R15.5 R14.5 R13.5 ; H1.1@27.68,28.46 27.68,24 29.68,22 32.76,22 36,18.76 36,-6.86 32.76,-10.1 R13.5 ; H1.1@107.211,28.464 107.211,5.211 103,1 70,1 70,-3.196 67.2,-5.996 67.2,-13.69 65.89,-15 24,-15 22,-13 R13.5
NetH1_25: H1.25 H2.26 RES1.1 RES2.1 | length 286.8
  Top Layer w0.5: H1.25 60.62,26 65.438,26 67,27.562 67,38 69,40 94,40 98,44 98,51.45 100,53.45 114,53.45 117,56.45 RES1.1 RES2.1 135,66 124.33,55.33 124.33,-31.67 H2.26
NetH1_26: H1.26 H2.25 RES1.2 RES2.2 | length 325.9
  Top Layer w0.5: H1.26 58.16,34.959 66.201,43 87,43 93.991,49.991 94.661,49.991 100,55.33 111.33,55.33 113,57 113,90 RES1.2 RES2.2 141,88 141,70 125.13,54.13 125.13,-32.001 124,-33.131 124,-38 76.383,-38 76.295,-38.088 72.52,-38.088 71.8,-37.367 71.8,-33.592 72.52,-32.872 73.325,-32.872 73.833,-32.365 H2.25
NetH1_35: H1.35 ULN2.5 ULN2.6 ULN2.7 ULN2.8 | length 359.3
  Bottom Layer w0.5: ULN2.5 ULN2.6 ULN2.7 ULN2.8 50.54,-58.923 48.463,-61 15,-61 13,-59 13,-51 10,-48 -65,-48 -65,-27.468 -65.035,-27.433 -65.035,-22.035 -58,-15 -43,-15 -38,-10 -38,8 -33,13 29.22,13 32.949,9.271 79.271,9.271 H1.35
NetH1_37: H1.37 ULN3.1 ULN3.2 ULN3.3 ULN3.4 | length 152.1
  Top Layer w0.5: v1@46.189,16.189 80,16.189 81.811,18 H1.37
  Bottom Layer w0.5: ULN3.1 ULN3.2 ULN3.3 ULN3.4 -4,41.54 -5,42.54 -5,51 -1.76,54.24 10,54.24 17.811,46.429 17.811,18.377 20,16.189 v1(46,16.189)
NetH1_45: H1.45 R14.1 | length 122.8
  Bottom Layer w0.5: R14.1 -1.1,9 28.9,9 31.9,6 90.431,6 91.971,7.54 H1.45
NetH1_47: H1.47 R13.1 | length 103.3
  Bottom Layer w0.5: R13.1 18.9,7 29,7 31.9,4.1 91.1,4.1 94.511,7.511 H1.47
NetH1_49: H1.49 R16.1 | length 167.5
  Bottom Layer w0.5: R16.1 -22.9,69 95,69 100,64 100,31.413 H1.49
NetH1_70: H1.70 R16.5 | length 156.1
  Bottom Layer w0.5: R16.5 -27.18,58.9 -34,65.72 -34,73 -31.454,75.546 95.076,75.546 95.873,74.748 95.873,74.184 H1.70
NetH1_71: H1.71 R15.1 | length 167.3
  Top Layer w0.5: R15.1 -27,15 -24,18 18,18 22,22 22,33 26,37 54,37 64,47 88,47 98,57 98,58.369 H1.71
NetH2_17: H2.17 ULN2.1 ULN2.2 ULN2.3 ULN2.4 | length 87.6
  Top Layer w0.5: ULN2.1 ULN2.2 ULN2.3 ULN2.4 40.38,-58 46.38,-64 63,-64 65,-62 65,-58 69,-54 69,-25.648 H2.17
NetH2_35: H2.35 ULN1.1 ULN1.2 ULN1.3 ULN1.4 | length 73.7
  Bottom Layer w0.5: ULN1.1 ULN1.2 ULN1.3 ULN1.4 40.38,-80 43.38,-83 66,-83 67,-82 67,-58.923 H2.35
NetH2_37: H2.37 ULN1.5 ULN1.6 ULN1.7 ULN1.8 | length 57.5
  Top Layer w0.5: ULN1.5 ULN1.6 ULN1.7 ULN1.8 50.54,-78.54 52.51,-80.51 67.49,-80.51 69,-79 69,-59.463 H2.37
NetH2_49: H2.49 R11.1 | length 135.5
  Bottom Layer w0.5: R11.1 1.43,-33 59,-33 70.617,-44.617 78.141,-44.617 83,-49.476 83,-74 82,-75 77.581,-75 H2.49
NetH2_71: H2.71 R12.1 | length 160.9
  Bottom Layer w0.5: R12.1 -17.18,-25.57 -15.58,-23.97 55.507,-23.97 70.737,-39.2 78.141,-39.2 107.432,-68.491 H2.71
NetL1_3: L1.3 ROS2.3 ROS2.4 | length 42.8
  Bottom Layer w0.5: ROS2.3 ROS2.4 38,85.55 40.55,83 L1.3
NetL2_3: L2.3 ROS2.1 ROS2.2 | length 83.2
  Bottom Layer w0.5: ROS2.1 ROS2.2 21.49,81 24.59,77.9 74.9,77.9 L2.3
NetL3_3: L3.3 TB1.18 | length 52.9
  Bottom Layer w0.5: L3.3 -70,7 -64,13 -51,13 -46,18 -46,23.22 TB1.18
NetR1_1: R1.1 R7.5 | length 31.9
  Top Layer w3: R7.5 -139,53.05 -139,46.1 -129.85,36.95 R1.1
NetR1_5: R1.5 R2.1 | length 31.7
  Top Layer w3: R1.5 -139,28.05 -139,22.189 -127.762,10.95 R2.1
NetR2_5: R2.5 R3.1 | length 32.4
  Top Layer w3: R2.5 -139,2.05 -139,-5 -128.95,-15.05 R3.1
NetR4_4: R4.4 ULN1.15 ULN1.16 ULN1.17 ULN1.18 | length 37.9
  Bottom Layer w0.5: R4.4 24,-71.1 24,-68.381 26,-66.381 ULN1.18 ULN1.17 ULN1.16 ULN1.15
NetR5_5: R5.5 R6.2 | length 49.7
  Top Layer w3: R6.2 -74.95,75.95 R5.5
NetR6_5: R6.5 R7.1 | length 31.2
  Top Layer w3: R6.5 -139,79.05 -139,74 -126.95,61.95 R7.1
NetR8_4: R8.4 ULN2.15 ULN2.16 ULN2.17 ULN2.18 | length 120.3
  Top Layer w0.5: R8.4 -40.9,-71.1 -38,-68.2 -38,-55 -36,-53 -16,-53 -12,-49 7.1,-49 12,-53.9 12,-57.861 13.139,-59 29,-59 30,-58 30,-44.95 ULN2.18 ULN2.17 ULN2.16 ULN2.15
NetR9_4: R9.4 ULN1.11 ULN1.12 ULN1.13 ULN1.14 | length 97.6
  Top Layer w0.5: R9.4 -16.1,-71.1 -15,-70 -15,-56 -9.45,-50.45 5.669,-50.45 10,-54.781 10,-59 12,-61 41.38,-61 42.92,-62.54 ULN1.14 ULN1.13 ULN1.12 ULN1.11
NetR10_1: R10.1 ROS3.1 | length 93.5
  Bottom Layer w3: ROS3.1 -139.25,-89 -83.9,-89 -78,-83.1 -78,-73 R10.1
NetR17_3: R17.3 ULN2.11 ULN2.12 ULN2.13 ULN2.14 | length 127.3
  Bottom Layer w0.5: R17.3 -54,-42 -52,-44 21,-44 30.79,-34.21 47.21,-34.21 50.54,-37.54 ULN2.11 ULN2.12 ULN2.13 ULN2.14
NetR18_3: R18.3 ULN3.15 ULN3.16 ULN3.17 ULN3.18 | length 117.9
  Bottom Layer w0.5: R18.3 -48,-1.29 -48,8 -35,21 12,21 14,23 14,39 11.46,41.54 ULN3.15 ULN3.16 ULN3.17 ULN3.18
NetR19_3: R19.3 ULN3.11 ULN3.12 ULN3.13 ULN3.14 | length 44.1
  Top Layer w0.5: R19.3 -24.9,33 -14,33 -11,30 -1.997,30 -1.957,30.04 5.04,30.04 6.38,31.38 ULN3.11 ULN3.12 ULN3.13 ULN3.14
NetTB1_5: TB1.5 ULN3.5 ULN3.6 ULN3.7 ULN3.8 | length 119.2
  Bottom Layer w0.5: TB1.5 -49,49.16 -47,51.16 -47,60 -42,65 -37,65 -35,63 -35,25 -33,23 -6,23 -4,25 -4,28.19 ULN3.8 ULN3.7 ULN3.6 ULN3.5
PRECHARGE: IDC34.19 R8.1 | length 149.9
  Top Layer w0.5: IDC34.19 -91,-10.1 -90.1,-11 -90,-11 -90,-14 -93.66,-17.66 -93.66,-35.331 -105,-46.671 -105,-76.1 -100.125,-80.975 -59.229,-80.975 -58,-79.747 -58,-60 -56.9,-58.9 R8.1
RFE: IDC34.23 R17.1 | length 61.7
  Top Layer w0.5: v1(-69,-22) -67.245,-23.755 -60.669,-23.755 -58.854,-25.57 R17.1
  Bottom Layer w0.5: IDC34.23 -91,0.06 -89,-1.94 -89,-20.035 -87.035,-22 v1(-69,-22)
RTD: H2.47 IDC34.7 | length 300.6
  Top Layer w0.5: v1(-118,13) -118,-39.101 v1(-110.101,-47)
  Bottom Layer w0.5: v1(-118,13) -117.76,12.76 IDC34.7 ; v1(-110.101,-47) -109.235,-47.866 -109.235,-49.512 -108.512,-50.235 -107.488,-50.235 -107.177,-49.924 -20.207,-49.924 3.769,-73.9 28.83,-73.9 31.58,-76.65 37.419,-76.65 38.78,-78.011 38.78,-80.663 42.717,-84.6 66.663,-84.6 68.6,-82.663 68.6,-69.4 69.979,-68.021 H2.47
RTDS: IDC34.18 R9.1 | length 169.3
  Top Layer w0.5: IDC34.18 -94.46,-35 -106,-46.54 -106,-78 -102,-82 -35,-82 -35,-60 -34,-59 -34,-58.9 R9.1
SDC_OUT: R5.2 ROS1.3 | length 290.3
  Bottom Layer w3: ROS1.3 -115,-77.26 -115,-80.318 -117.341,-82.659 -118.592,-83.91 -130.998,-83.91 -145.4,-69.508 -145.4,-25.541 -139.1,-19.241 -139.1,91 -136.1,94 -115,94 -109.55,88.55 -67,88.55 R5.2
START: H2.45 IDC34.6 | length 299.5
  Top Layer w0.5: v1(-116,15.3) -116.035,15.265 -116.035,-38.965 -108,-47 v1(-108,-49)
  Bottom Layer w0.5: v1(-116,15.3) IDC34.6 ; v1(-108,-49) -20,-49 4.1,-73.1 29.161,-73.1 31.911,-75.85 37.75,-75.85 39.58,-77.68 39.58,-80.331 43.049,-83.8 66.331,-83.8 67.8,-82.331 67.8,-68.4 70.719,-65.481 H2.45
pads on no net: H1.2 H1.3 H1.4 H1.5 H1.6 H1.7 H1.8 H1.9 H1.10 H1.11 H1.12 H1.13 H1.14 H1.15 H1.16 H1.17 H1.18 H1.19 H1.20 H1.21 H1.22 H1.23 H1.24 H1.27 H1.28 H1.29 H1.30 H1.31 H1.32 H1.33 H1.34 H1.36 H1.38 H1.39 H1.40 H1.41 H1.42 H1.43 H1.44 H1.46 H1.48 H1.50 H1.51 H1.52 H1.53 H1.54 H1.55 H1.56 H1.57 H1.58 H1.59 H1.60 H1.61 H1.62 H1.64 H1.66 H1.67 H1.68 H1.69 H1.72 H1.73 H1.74 H1.75 H1.76 H1.77 H1.78 H1.79 H1.80 H1.81 H1.82 H2.2 H2.3 H2.4 H2.5 H2.6 H2.7 H2.8 H2.9 H2.10 H2.11 H2.12 H2.13 H2.14 H2.15 H2.16 H2.18 H2.19 H2.20 H2.21 H2.22 H2.23 H2.24 H2.27 H2.28 H2.29 H2.30 H2.31 H2.32 H2.33 H2.34 H2.36 H2.38 H2.39 H2.40 H2.41 H2.42 H2.43 H2.44 H2.46 H2.48 H2.50 H2.51 H2.52 H2.53 H2.54 H2.55 H2.56 H2.57 H2.58 H2.59 H2.60 H2.61 H2.62 H2.63 H2.64 H2.65 H2.66 H2.67 H2.68 H2.69 H2.70 H2.72 H2.73 H2.74 H2.75 H2.76 H2.77 H2.78 H2.79 H2.80 H2.81 H2.82 IDC34.28 IDC34.29 IDC34.30 IDC34.31 IDC34.32 IDC34.33 IDC34.34 R3.2 R4.2 R6.4 R7.2 R8.2 R9.2 R10.2 R11.2 R12.2 R13.2 R14.2 R15.2 R16.2 R17.2 R18.2 R19.2 TB1.1 TB1.2 TB1.3 TB1.4 TB1.6 TB1.7 TB1.8 TB1.9 TB1.10 TB1.11 TB1.12 TB1.13 TB1.14 TB1.16 TB1.17 TB1.20 TB1.21 TB1.22 TB1.23 TB1.24 TB1.25 TB1.26 TB1.27 TB1.28 TB1.29 TB1.30 ULN1.9 ULN2.9 ULN3.9

## Text inside footprints (layer, text, board x,y; h text height)
R1: Mechanical 29 "NC" at -122.7,26.45 h1.2; Mechanical 29 "NO" at -122.7,34.15 h1.2; Top Overlay "NO" at -122.7,34.15 h1.2; Top Overlay "NC" at -122.7,26.45 h1.2
R2: Mechanical 29 "NC" at -122.7,0.45 h1.2; Mechanical 29 "NO" at -122.7,8.15 h1.2; Top Overlay "NO" at -122.7,8.15 h1.2; Top Overlay "NC" at -122.7,0.45 h1.2
R3: Mechanical 29 "NC" at -122.7,-25.55 h1.2; Mechanical 29 "NO" at -122.7,-17.85 h1.2; Top Overlay "NO" at -122.7,-17.85 h1.2; Top Overlay "NC" at -122.7,-25.55 h1.2
R4: Mechanical 29 "NC" at 4.5,-59.7 h1.2 r90; Mechanical 29 "NO" at -3.2,-59.7 h1.2 r90; Top Overlay "NO" at -3.2,-59.7 h1.2 r90; Top Overlay "NC" at 4.5,-59.7 h1.2 r90
R5: Mechanical 29 "NC" at -68.5,91.3 h1.2 r90; Mechanical 29 "NO" at -76.2,91.3 h1.2 r90; Top Overlay "NO" at -76.2,91.3 h1.2 r90; Top Overlay "NC" at -68.5,91.3 h1.2 r90
R6: Mechanical 29 "NC" at -122.7,77.45 h1.2; Mechanical 29 "NO" at -122.7,85.15 h1.2; Top Overlay "NO" at -122.7,85.15 h1.2; Top Overlay "NC" at -122.7,77.45 h1.2
R7: Mechanical 29 "NC" at -122.7,51.45 h1.2; Mechanical 29 "NO" at -122.7,59.15 h1.2; Top Overlay "NO" at -122.7,59.15 h1.2; Top Overlay "NC" at -122.7,51.45 h1.2
R8: Mechanical 29 "NC" at -43.5,-59.7 h1.2 r90; Mechanical 29 "NO" at -51.2,-59.7 h1.2 r90; Top Overlay "NO" at -51.2,-59.7 h1.2 r90; Top Overlay "NC" at -43.5,-59.7 h1.2 r90
R9: Mechanical 29 "NC" at -20.5,-59.7 h1.2 r90; Mechanical 29 "NO" at -28.2,-59.7 h1.2 r90; Top Overlay "NO" at -28.2,-59.7 h1.2 r90; Top Overlay "NC" at -20.5,-59.7 h1.2 r90
R10: Mechanical 29 "NC" at -86.7,-75.6 h1.2; Mechanical 29 "NO" at -86.7,-67.9 h1.2; Top Overlay "NO" at -86.7,-67.9 h1.2; Top Overlay "NC" at -86.7,-75.6 h1.2
R11: Mechanical 29 "NC" at 4.5,-26.37 h1.2 r90; Mechanical 29 "NO" at -3.2,-26.37 h1.2 r90; Top Overlay "NO" at -3.2,-26.37 h1.2 r90; Top Overlay "NC" at 4.5,-26.37 h1.2 r90
R12: Mechanical 29 "NC" at -16.5,-26.37 h1.2 r90; Mechanical 29 "NO" at -24.2,-26.37 h1.2 r90; Top Overlay "NO" at -24.2,-26.37 h1.2 r90; Top Overlay "NC" at -16.5,-26.37 h1.2 r90
R13: Mechanical 29 "NC" at 26.5,3.3 h1.2 r90; Mechanical 29 "NO" at 18.8,3.3 h1.2 r90; Top Overlay "NO" at 18.8,3.3 h1.2 r90; Top Overlay "NC" at 26.5,3.3 h1.2 r90
R14: Mechanical 29 "NC" at 4.5,3.3 h1.2 r90; Mechanical 29 "NO" at -3.2,3.3 h1.2 r90; Top Overlay "NO" at -3.2,3.3 h1.2 r90; Top Overlay "NC" at 4.5,3.3 h1.2 r90
R15: Mechanical 29 "NC" at -16.5,3.3 h1.2 r90; Mechanical 29 "NO" at -24.2,3.3 h1.2 r90; Top Overlay "NO" at -24.2,3.3 h1.2 r90; Top Overlay "NC" at -16.5,3.3 h1.2 r90
R16: Mechanical 29 "NC" at -16.5,72.3 h1.2 r90; Mechanical 29 "NO" at -24.2,72.3 h1.2 r90; Top Overlay "NO" at -24.2,72.3 h1.2 r90; Top Overlay "NC" at -16.5,72.3 h1.2 r90
R17: Mechanical 29 "NC" at -43.5,-26.37 h1.2 r90; Mechanical 29 "NO" at -51.2,-26.37 h1.2 r90; Top Overlay "NO" at -51.2,-26.37 h1.2 r90; Top Overlay "NC" at -43.5,-26.37 h1.2 r90
R18: Mechanical 29 "NC" at -43.5,4.11 h1.2 r90; Mechanical 29 "NO" at -51.2,4.11 h1.2 r90; Top Overlay "NO" at -51.2,4.11 h1.2 r90; Top Overlay "NC" at -43.5,4.11 h1.2 r90
R19: Mechanical 29 "NC" at -16.5,42.3 h1.2 r90; Mechanical 29 "NO" at -24.2,42.3 h1.2 r90; Top Overlay "NO" at -24.2,42.3 h1.2 r90; Top Overlay "NC" at -16.5,42.3 h1.2 r90